# Altium PCB PCB1.PcbDoc
Units mil, origin at the board's own origin, x right, y up, seen from the top; angles counter-clockwise.
Board outline 1820 x 900 mil, 2 copper layers (Top Layer, Bottom Layer); 6 components, 5 nets, 18 pads, 3 vias.
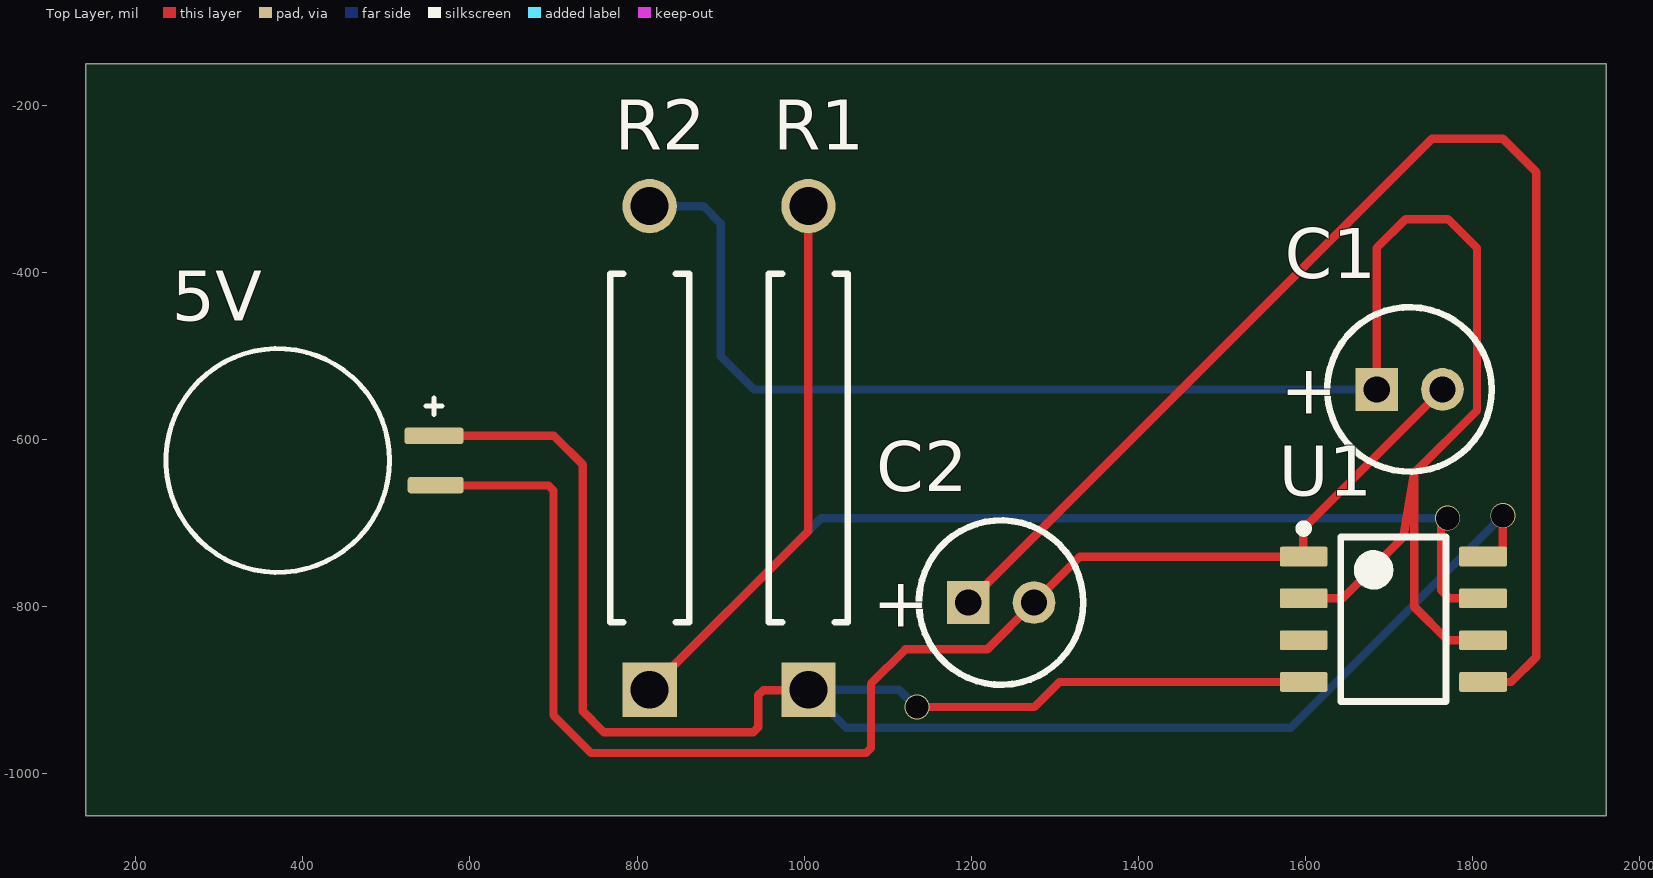
[diagram p0: Top Layer view]
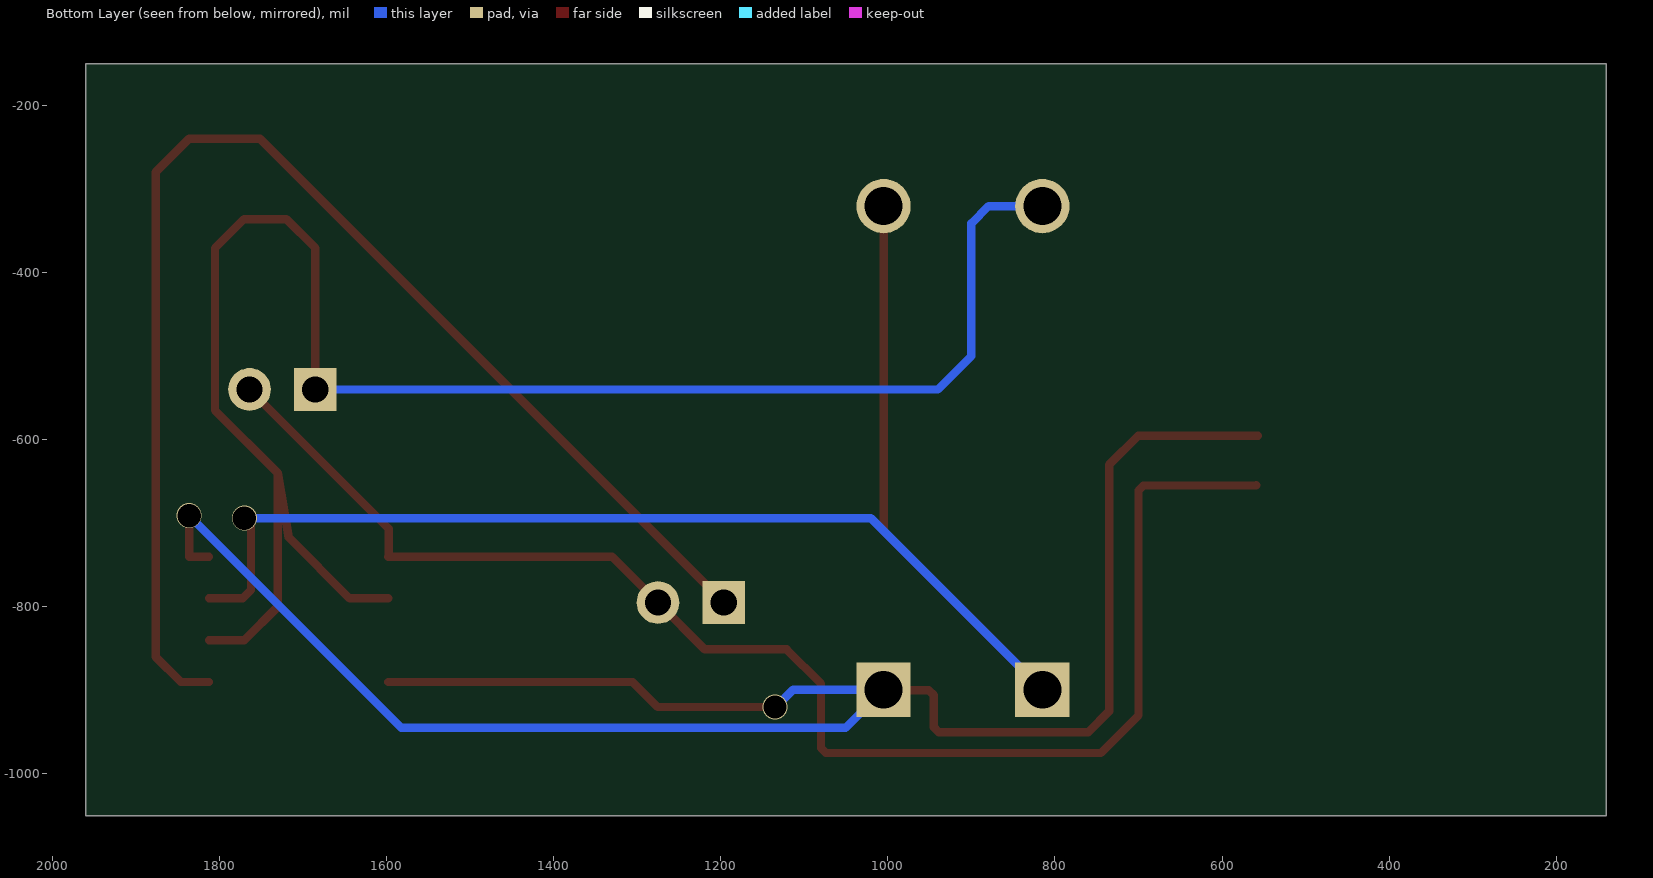
[diagram p1: Bottom Layer view, seen from below]

## Layer stack, top to bottom
Top Solder: solder mask 0.4, Solder Resist, Dk 3.5
Top Layer: signal copper 1.4
Dielectric 1: dielectric 12.6, FR-4, Dk 4.8
Bottom Layer: signal copper 1.4
Bottom Solder: solder mask 0.4, Solder Resist, Dk 3.5

## Board outline
140,-1050 1960,-1050 1960,-150 140,-150

## Design rules (kind name [scope] priority, off if disabled: settings)
Clearance [All] p1: gap=10 ignorepadtopadclearanceinfootprint=FALSE
PolygonConnect [All] p1: connectstyle=Relief reliefconductorwidth=10 reliefentries=4 polygonreliefangle="90 Angle" airgapwidth=10
RoutingVias [All] p1: holewidth=28 width=50 viastyle="Through Hole" minholewidth=28 minwidth=50 maxholewidth=28 maxwidth=50
SolderMaskExpansion [All] p1: expansion=4 istentingtop=FALSE
Width [All] p1: maxlimit=10 minlimit=10 preferedwidth=10
30 further rules are at their usual default settings.

## Components (designator, comment, footprint, x,y, rotation, side; value= is the part's Value field where it differs from the comment)
5V "MS621FE-FL11E" SEIK-MS621FE-FL11E-2_V 370,-625 r0 top
C1 "ECA-1HHG010" CAPPR55-200-1100X500X1200 1724.37,-540 r0 top value=4.7µF
C2 "ECA-1HHG010" CAPPR55-200-1100X500X1200 1235.63,-795 r0 top locked value=10nF
R1 "12FR050E" RESA86-1060X240 1005,-610 r90 top value=68k
R2 "12FR050E" RESA86-1060X240 815,-610 r90 top value=150k
U1 "NE555DR" D0008A_N 1705,-815 r0 top

## Footprints (in the part's own frame and the unit in brackets; to place one, negate y for a bottom-side part, rotate by r counter-clockwise, add the part's x,y. Pads: shape width x height; smd on the part's side, far side on the other; paste and mask are expansions set on the pad)
CAPPR55-200-1100X500X1200 [mm] "THD, 2-Leads, Dia 5mm, Pin Spacing 2mm"
  rect 1.3x1.3 hole 0.8: 1(-1,0)
  round 1.3 hole 0.8: 2(1,0)
  silkscreen extent -2.5,-2.5 2.5,2.5, body extent -2.5,-2.5 2.45,2.5, height 12
D0008A_N [mm] "SOIC, 8-Leads, Body 5x4mm, Pitch 1.27mm, IPC Medium Density"
  rrect17% 1.45x0.6 smd: 1(-2.725,1.905) 2(-2.725,0.635) 3(-2.725,-0.635) 4(-2.725,-1.905) 5(2.725,-1.905) 6(2.725,-0.635) 7(2.725,0.635) 8(2.725,1.905)
  silkscreen extent -2.85,-2.5 1.6,2.88, body extent -3,-2.45 3,2.45, height 1.63
RESA86-1060X240 [mm] "Axial Resistor, 2-Leads, Dia 2.4mm, Body Length 10.6mm"
  rect 1.65x1.65 hole 1.15: 1(-7.35,0)
  round 1.65 hole 1.15: 2(7.35,0)
  silkscreen extent -5.3,-1.2 5.3,1.2, body extent -7.76,-1.19 7.76,1.2, height 2.4
SEIK-MS621FE-FL11E-2_V [mm] "SMD, 2-Leads, Diameter 6.8mm"
  rrect35% 1.8x0.5 smd: 1(4.75,0.75)
  rrect35% 1.7x0.5 smd: 2(4.8,-0.75)
  silkscreen extent -3.4,-3.4 5,3.4, body extent -3.4,-3.4 4.35,3.4, height 2.7

## Part data
5V: library part CMP-00029-00000-1, "MS Lihium Rechargeable Battery, 3 V, -20 to 60 degC, Tray", Mounting Technology=WithLeads, Pins=2, RoHS Compliant=NotApplicable
C1 C2: library part CMP-001-00024-7, "Aluminum Electrolytic Capacitor, 1 uF, +/- 20%, 50 V, -55 to 105 degC, 2-Pin THD, RoHS, Bulk", Capacitor Type=Electrolytic, Case/Package=Radial, Manufacturer=Panasonic, Max Operating Temperature=105°C, Min Operating Temperature=-55°C, Package Description="2-Pin Radial Lead, Dia 5 mm, Height 12 mm", Package Quantity=200, Package Reference=CAPPR55-200-1100X500X1200, Ripple Current=10mA, Tolerance=20%, Voltage Rating=50V, Datasheet URL=https://datasheet.ciiva.com/7275/94060-7275472.pdf, Datasheet Version=Mar-05, Diameter=5mm, Lead Pitch=2mm, Manufacturer URL=http://www.panasonic.com/, Mounting Technology=TH, Packaging=Bulk, Pins=2, Ripple Current (AC)=10mA, RoHS Compliant=True
R1 R2: library part CMP-009-00035-4, "Axial Resistor, 50 mOhm, +/- 1%, 2 W, -55 to 275 degC, 2-Pin THD, RoHS, Bulk", Case/Package=Axial, Manufacturer=Ohmite, Max Operating Temperature=275°C, Min Operating Temperature=-55°C, Package Description="2-Pin Axial Lead, Dia 2.4 mm, Body Length 10.6 mm", Package Quantity=10, Power=2W, Tolerance=1%, Voltage Rating=100mV, Composition=Wirewound, Datasheet URL=http://www.ohmite.com/cat/res_10.pdf, Datasheet Version=Jun-15, Diameter=2.4mm, Manufacturer URL=http://www.ohmite.com/, Mounting Technology=TH, Package Reference=12FR050E, Packaging=Bulk, Pins=2, RoHS Compliant=True
U1: library part CMP-016-00007-3, "Precision Timer, 4.5 to 16 V, 0 to 70 degC, 8-Pin SOIC (D), Green (RoHS & no Sb/Br), Tape and Reel", Case/Package=SOIC, Frequency=100kHz, Manufacturer="Texas Instruments", Max Operating Temperature=70°C, Max Ouput Current=-200mA, Max Supply Voltage=16V, Min Operating Temperature=0°C, Min Supply Voltage=4.5V, Package Description="8-Pin Small Outline Integrated Circuit, Body 4.9 x 3.9 mm, Pitch 1.27 mm", Package Quantity=2500, Package Reference=D0008A, Package Version="4040047-3/M, 06/2011", Datasheet URL=http://www.ti.com/general/docs/lit/getliterature.tsp?genericPartNumber=NE555&fileType=pdf, Datasheet Version="SLFS022I, 09/2014", Manufacturer URL=http://www.ti.com/, Mounting Technology=SM, Package URL=http://www.ti.com/lit/ml/msoi002j/msoi002j.pdf, Packaging=TapeandReel, Pins=8, RoHS Compliant=True

## Via types
v1: diameter 30, hole 28, Top Layer to Bottom Layer, 3 vias

## Nets (pads, with @x,y where several pads share a name; then routed paths per layer and width w, separated by ;. In a path a pad name is that pad's centre, name@x,y a point inside that pad or via, vN(x,y) a via of type N, cw(c..) or ccw(c..) an arc to the next point about the centre after c; other vN are vias at no path point)
Net5V_1: 5V.1 R1.1 U1.4 U1.8 | length 2452.6
  Top Layer w10: 5V.1 700.47,-595.47 735,-630 735,-925 760,-950 939.14,-950 945,-944.14 945,-905.86 950.86,-900 1004.37,-900 R1.1 ; v1(1135,-920) 1275.37,-920 1305.37,-890 U1.4 ; U1.8 1836,-740 v1(1836,-691)
  Bottom Layer w10: v1(1135,-920) 1133.83,-920 1113.2,-899.37 R1.1 1050.63,-945 1582,-945 v1(1836,-691)
Net5V_2: 5V.2 C1.2 C2.2 U1.1 | length 1740.7
  Top Layer w10: 5V.2 559.45,-655 694.14,-655 700,-660.86 700,-930 745,-975 1074.14,-975 1080,-969.14 1080,-892 1121,-851 1219,-851 C2.2 1330,-740 U1.1@1597,-740 ; U1.1 U1.1@1597,-740 ; C1.2 1597,-706.74 U1.1@1597,-740
NetC1_1: C1.1 R2.2 U1.2 U1.6 | length 2158.2
  Top Layer w10: U1.2 1644,-790 1716.77,-717.23 1730,-639.96 ; C1.1 1685,-371 1719.84,-336.16 1770.16,-336.16 1805,-371 1805,-564.96 1730,-639.96 ; U1.6 1770,-840 1730,-800 1730,-639.96
  Bottom Layer w10: R2.2 879.37,-320.63 900,-341.26 900,-500 940,-540 C1.1
NetC2_1: C2.1 U1.5 | length 1582.3
  Top Layer w10: C2.1 1751.26,-240 1836,-240 1876,-280 1876,-860 1846,-890 U1.5
NetR1_2: R1.2 R2.1 U1.7 | length 1841.2
  Top Layer w10: R2.1 1005,-709.37 R1.2 ; v1(1770,-694) 1762,-702 1762,-780 1772,-790 U1.7
  Bottom Layer w10: R2.1 1020.37,-694 v1(1770,-694)
pads on no net: U1.3

## Text inside footprints (layer, text, board x,y; h text height)
C1: Top Overlay "+" at 1570.51,-569.02 h59.06
C2: Top Overlay "+" at 1081.77,-824.02 h59.06